# Altium PCB vga-wing.PcbDoc
Units mm, origin at the board's own origin, x right, y up, seen from the top; angles counter-clockwise.
Board outline 50 x 20.32 mm, 2 copper layers (Top Layer, Bottom Layer); 10 components, 14 nets, 45 pads, 0 vias.
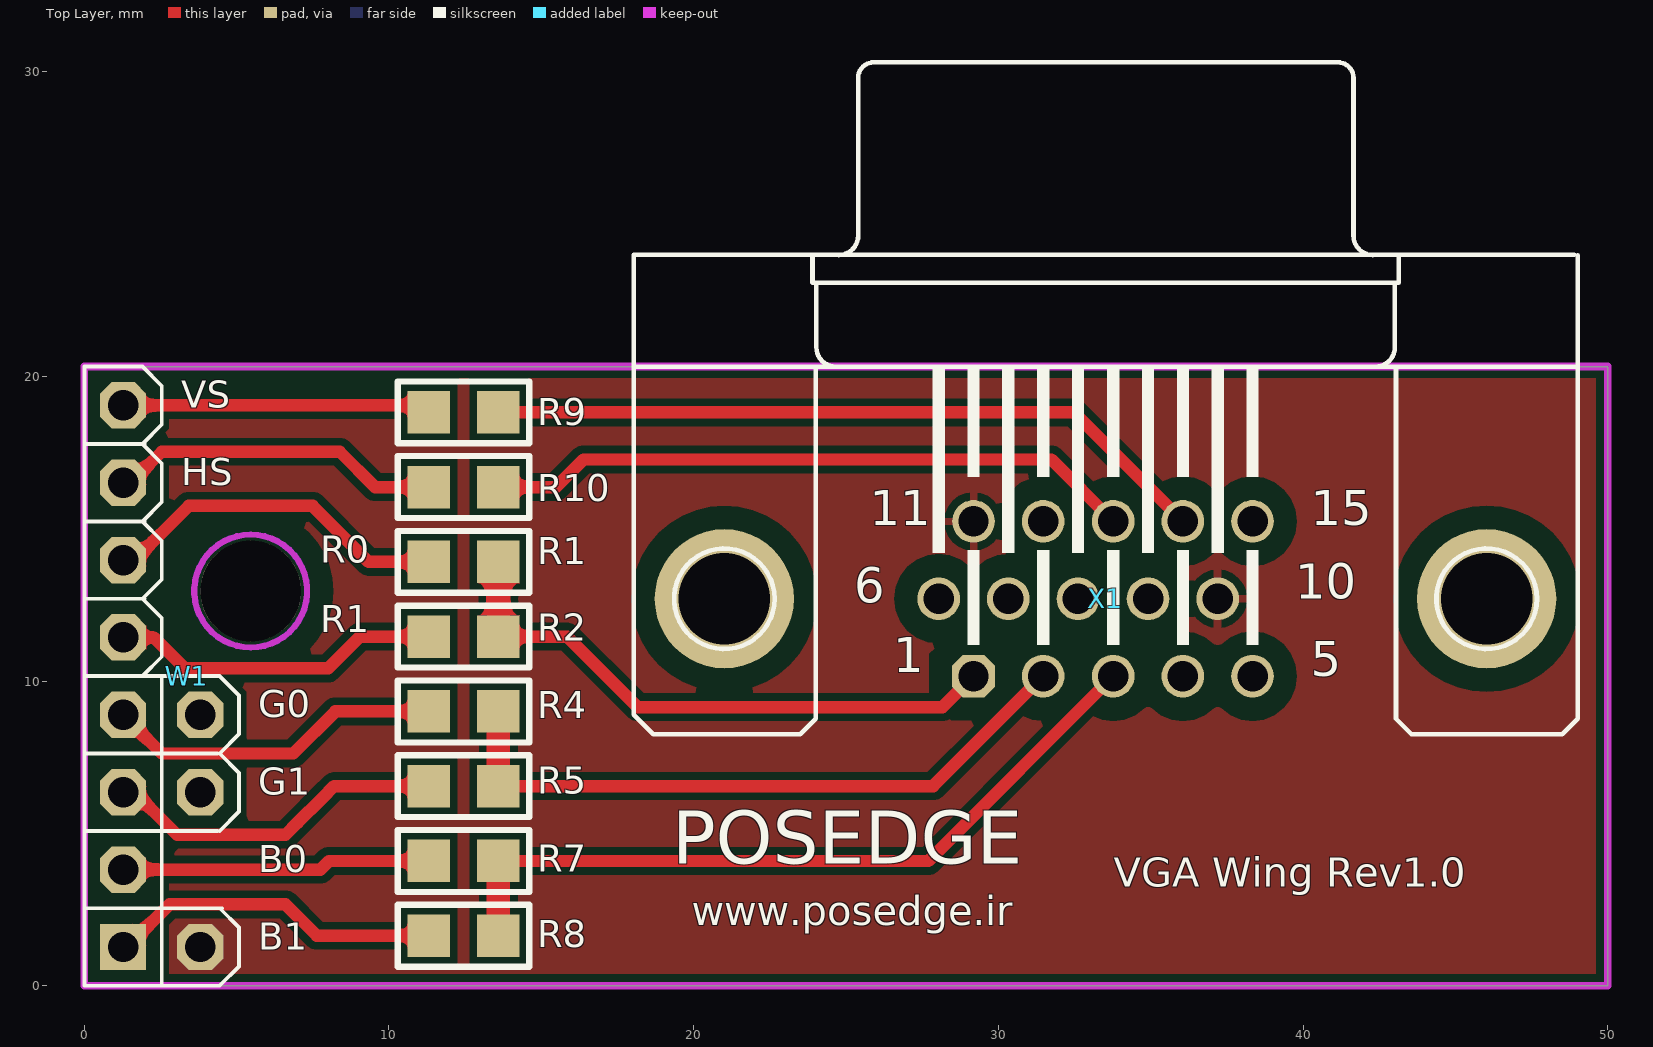
[diagram p0: Top Layer view]
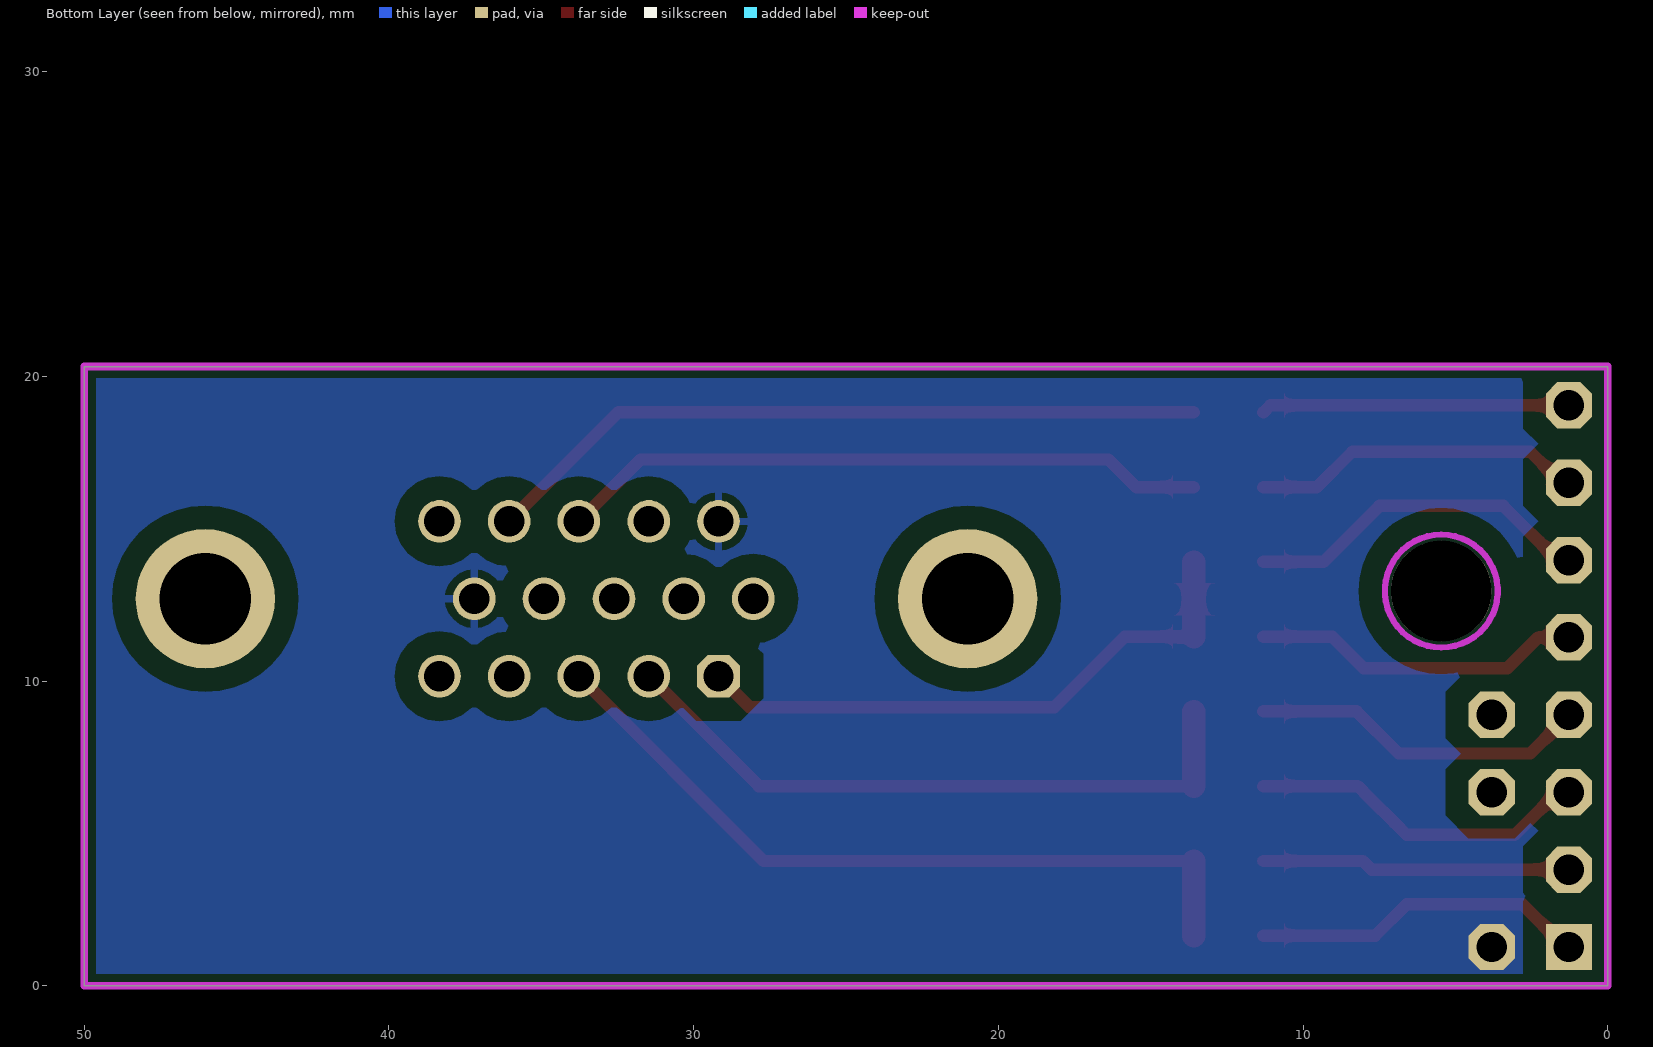
[diagram p1: Bottom Layer view, seen from below]
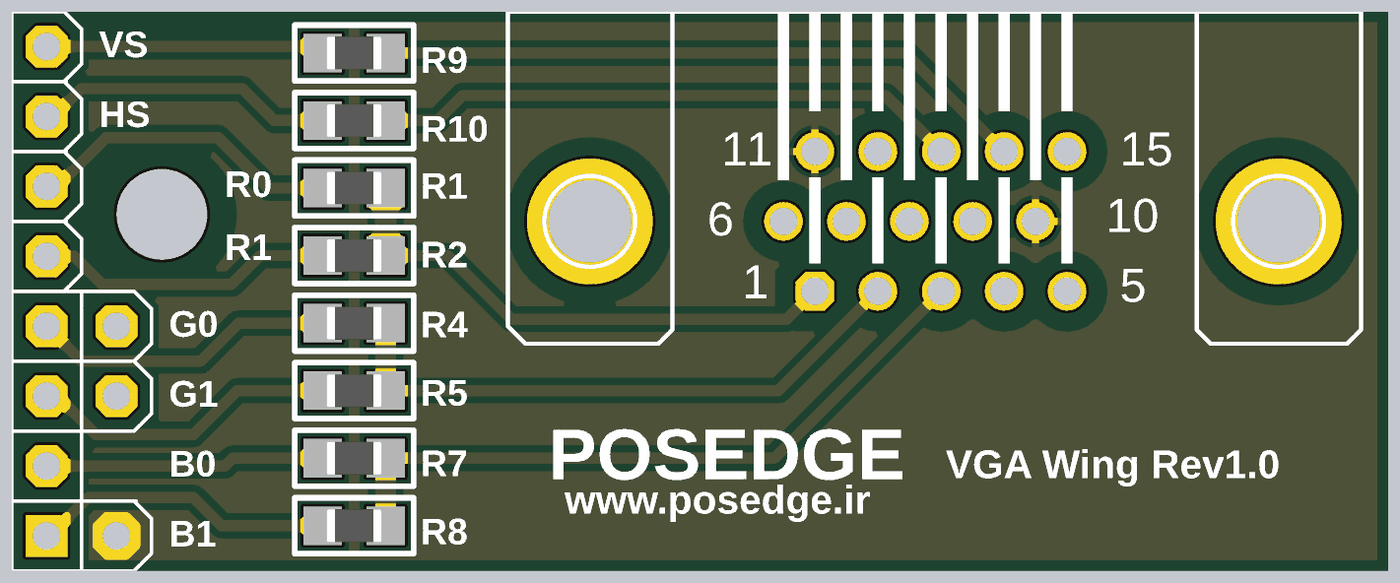
[diagram p2: 3D render of the assembled board from above, using the file's embedded part models]

## Layer stack, top to bottom
Top Solder: solder mask 0.0102, Solder Resist, Dk 3.5
Top Layer: signal copper 0.0356
Dielectric 1: dielectric 0.32, FR-4, Dk 4.8
Bottom Layer: signal copper 0.0356
Bottom Solder: solder mask 0.0102, Solder Resist, Dk 3.5

## Board outline
0,0 50,0 50,20.32 0,20.32

## Design rules (kind name [scope] priority, off if disabled: settings)
Clearance Clearance_Poly_to_con [InPoly vs InComponent('P*','J*','W*','X*')] p1: gap=0.762
Clearance Clearance_poly_to_all [InNet('GND') and InPoly] p2 off: gap=0.559
Clearance Clearance_all_to_all [All] p3: gap=0.254
DiffPairsRouting [All] p1: maxlimit=0.254 minlimit=0.254 mostfreqgap=0.254 toplayer_minwidth=0.254 toplayer_maxwidth=0.381 toplayer_prefwidth=0.381 bottomlayer_minwidth=0.254 bottomlayer_maxwidth=0.381 bottomlayer_prefwidth=0.381 maxuncoupledlength=12.7
HoleSize [All] p1: absolutevalues=TRUE maxlimit=3.81 minlimit=0.025 maxpercent=80.000 minpercent=20.000
MinimumSolderMaskSliver [All] p1: minsoldermaskwidth=0.025
PolygonConnect PolygonConnect_1 [InNet('GND')  And InComponent('W*')] p1: connectstyle=Direct reliefconductorwidth=0.254 reliefentries=4 polygonreliefangle="90 Angle" airgapwidth=0.254
PolygonConnect PolygonConnect_via [IsVia] p2: connectstyle=Direct reliefconductorwidth=0.254 reliefentries=4 polygonreliefangle="90 Angle" airgapwidth=0.254
PolygonConnect PolygonConnect_GND [InNet('GND')] p3: connectstyle=Relief reliefconductorwidth=0.254 reliefentries=4 polygonreliefangle="90 Angle" airgapwidth=0.254
PolygonConnect [All] p4: connectstyle=Direct reliefconductorwidth=0.254 reliefentries=4 polygonreliefangle="90 Angle" airgapwidth=0.254
RoomDefinition vga-wing [InComponentClass('vga-wing')] p1: confinementstyle=ConfineIn formatcopy=TRUE lockcomponents=FALSE outline -44.831,-54.737 5.969,-54.737 5.969,-29.337 -44.831,-29.337
RoutingCorners RoutingCorners_1 [OnLayer('Top Overlay')] p1: cornerstyle=90-Degree minsetback=2.54 maxsetback=2.54
RoutingCorners [All] p2: cornerstyle=45-Degree minsetback=2.54 maxsetback=2.54
RoutingVias [All] p1: holewidth=0.5 width=0.8 viastyle="Through Hole" minholewidth=0.5 minwidth=0.8 maxholewidth=1.2 maxwidth=1.5
SilkToBoardRegionClearance [All] p1 off:
SilkToSilkClearance [All] p1: silktosilkclearance=0.076
SilkToSolderMaskClearance [IsPad] p1: minsilkscreentomaskgap=0.076 clearancetoexposedcopper=TRUE
SolderMaskExpansion [All] p1: expansion=0.102
UnRoutedNet UnRoutedNet_1 [All] p1:
UnRoutedNet [All] p2:
Width [All] p1: maxlimit=1.905 minlimit=0.254 preferedwidth=0.254 minimp=50.000000 maximp=50.000000 favimp=50.000000
22 further rules are at their usual default settings.

## Components (designator, comment, footprint, x,y, rotation, side; value= is the part's Value field where it differs from the comment)
R1 "390" R0805_M 12.446,13.911 r180 top
R2 "820" R0805_M 12.446,11.456 r180 top
R4 "390" R0805_M 12.446,9.002 r180 top
R5 "820" R0805_M 12.446,6.548 r180 top
R7 "390" R0805_M 12.446,4.094 r180 top
R8 "820" R0805_M 12.446,1.639 r180 top
R9 "82.5" R0805_M 12.446,18.819 r180 top
R10 "82.5" R0805_M 12.446,16.365 r180 top
W1 "WING8" WINGSIDE_8BIT 0,20.32 r270 top
X1 "<b>SUB-D</b>" HDF15H 33.528,12.7 r180 top

## Footprints (in the part's own frame and the unit in brackets; to place one, negate y for a bottom-side part, rotate by r counter-clockwise, add the part's x,y. Pads: shape width x height; smd on the part's side, far side on the other; paste and mask are expansions set on the pad)
HDF15H [mm]
  round 4.572 hole 3: 1(-12.5,0) 1(12.522,0)
  oct 1.4x1.4 hole 1: 1(4.343,2.54)
  round 1.4 hole 1: 2(2.057,2.54) 3(-0.243,2.54) 4(-2.529,2.54) 5(-4.815,2.54) 6(5.486,0) 7(3.2,0) 8(0.914,0) 9(-1.386,0) 10(-3.672,0) 11(4.343,-2.54) 12(2.057,-2.54) 13(-0.243,-2.54) 14(-2.529,-2.54) 15(-4.815,-2.54)
  silkscreen extent -15.49,-17.61 15.49,4.45
R0805_M [mil]
  rect 55x55 smd: 1(-45,0) 2(45,0)
  silkscreen extent -85,-40 85,40, body extent -39,-24 39,24, height 20
WINGSIDE_8BIT [mil]
  rect 60x60 hole 39.37: 0(750,50)
  round 130 hole 129.92 unplated: 1(290,215)
  oct 60x60 hole 39.37: 1(650,50) 2(550,50) 3(450,50) 3V3@2(550,150) 4(350,50) 5(250,50) 5V@2(450,150) 6(150,50) 7(50,50) GND@2(750,150)
  Top Layer keep-out lines w8: 363,215 cw(c290,215) 217,215 cw(c290,215) 363,215
  Bottom Layer keep-out lines w8: 363,215 cw(c290,215) 217,215 cw(c290,215) 363,215
  silkscreen extent 0,0 800,200

## Part data
R1 R2 R4 R5 R7 R8 R9 R10: library part R0805, "Chip Resistor size 0805"
X1: library part HF15H

## Nets (pads, with @x,y where several pads share a name; then routed paths per layer and width w, separated by ;. In a path a pad name is that pad's centre, name@x,y a point inside that pad or via, vN(x,y) a via of type N, cw(c..) or ccw(c..) an arc to the next point about the centre after c; other vN are vias at no path point)
BLUE: R7.1 R8.1 X1.3 | length 25.1
  Top Layer w0.406: R7.1 27.705,4.094 X1.3
  Top Layer w0.762: R8.1 R7.1
BLUE0: R7.2 W1.1@1.27,3.81 | length 10.2
  Top Layer w0.406: W1.1@1.27,3.81 7.747,3.81 8.031,4.094 R7.2
BLUE1: R8.2 W1.0 | length 11
  Top Layer w0.406: W1.0 1.397,1.27 2.794,2.667 6.604,2.667 7.632,1.639 R8.2
GND: W1.GND@2 X1.10 X1.11
GREEN: R4.1 R5.1 X1.2 | length 21.8
  Top Layer w0.406: R5.1 27.859,6.548 X1.2
  Top Layer w0.762: R5.1 R4.1
GREEN0: R4.2 W1.3 | length 11.1
  Top Layer w0.406: W1.3 2.54,7.62 6.858,7.62 8.24,9.002 R4.2
GREEN1: R5.2 W1.2 | length 11.3
  Top Layer w0.406: W1.2 1.651,6.35 3.048,4.953 6.604,4.953 7.003,5.352 7.8,6.149 8.199,6.548 R5.2
HS: R10.2 W1.6 | length 11.5
  Top Layer w0.406: W1.6@1.651,16.891 W1.6 1.524,16.51 2.54,17.526 8.382,17.526 9.543,16.365 R10.2
HS_R: R10.1 X1.13 | length 21.4
  Top Layer w0.406: R10.1 15.476,16.365 16.383,17.272 31.739,17.272 X1.13
RED: R1.1 R2.1 X1.1@29.185,10.16 | length 19.4
  Top Layer w0.406: R2.1 15.849,11.456 18.161,9.144 28.169,9.144 X1.1@29.185,10.16
  Top Layer w0.762: R2.1 R1.1
RED0: R1.2 W1.5 | length 11.5
  Top Layer w0.406: W1.5 1.651,13.97 3.429,15.748 7.493,15.748 9.33,13.911 R1.2
RED1: R2.2 W1.4 | length 10.9
  Top Layer w0.406: W1.4 2.286,11.43 3.302,10.414 8.001,10.414 9.043,11.456 R2.2
VS: R9.2 W1.7 | length 10.1
  Top Layer w0.406: W1.7 11.072,19.05 R9.2
VS_R: R9.1 X1.14 | length 24
  Top Layer w0.406: R9.1 32.478,18.819 X1.14
pads on no net: W1.1@5.461,12.954 W1.3V3@2 W1.5V@2 X1.1@21.006,12.7 X1.1@46.028,12.7 X1.4 X1.5 X1.6 X1.7 X1.8 X1.9 X1.12 X1.15

## Polygon pours and split planes (outlines as drawn)
GND on Top Layer "Top Paste-No Net" (solid, remove dead copper, pour order 4): 0,20.32 0,0 50,0 50,20.32
GND on Bottom Layer "Top Paste-No Net" (solid, remove dead copper, pour order 3): 0,20.32 0,0 50,0 50,20.32

## Keep-outs
Keep-Out Layer:
  the board outline again, w0.254

## Silkscreen, mask and mechanical layers (free items; w line width, h text height)
Top Overlay:
  text "VS" at 3.175,18.669 h1.52
  text "HS" at 3.175,16.129 h1.52
  text "R0" at 7.747,13.589 h1.52
  text "R1" at 7.747,11.303 h1.52
  text "G0" at 5.715,8.509 h1.52
  text "G1" at 5.715,5.969 h1.52
  text "B0" at 5.715,3.429 h1.52
  text "POSEDGE" at 19.304,3.429 h2.97
  text "VGA Wing Rev1.0" at 33.782,2.921 h1.65
  text "www.posedge.ir" at 19.939,1.651 h1.65
  text "B1" at 5.715,0.889 h1.52

## Text inside footprints (layer, text, board x,y; h text height)
X1: Top Overlay "11" at 25.781,14.732 h1.97; Top Overlay "15" at 40.259,14.732 h1.97; Top Overlay "10" at 39.751,12.319 h1.97; Top Overlay "6" at 25.273,12.192 h1.97; Top Overlay "5" at 40.259,9.779 h1.97; Top Overlay "1" at 26.543,9.906 h1.97; Mechanical 16 "HDF15 CONEC" at 39.624,22.352 h1.97 r180